# EAGLE board PCF8575C_Panel-v10 (EAGLE 5.00)
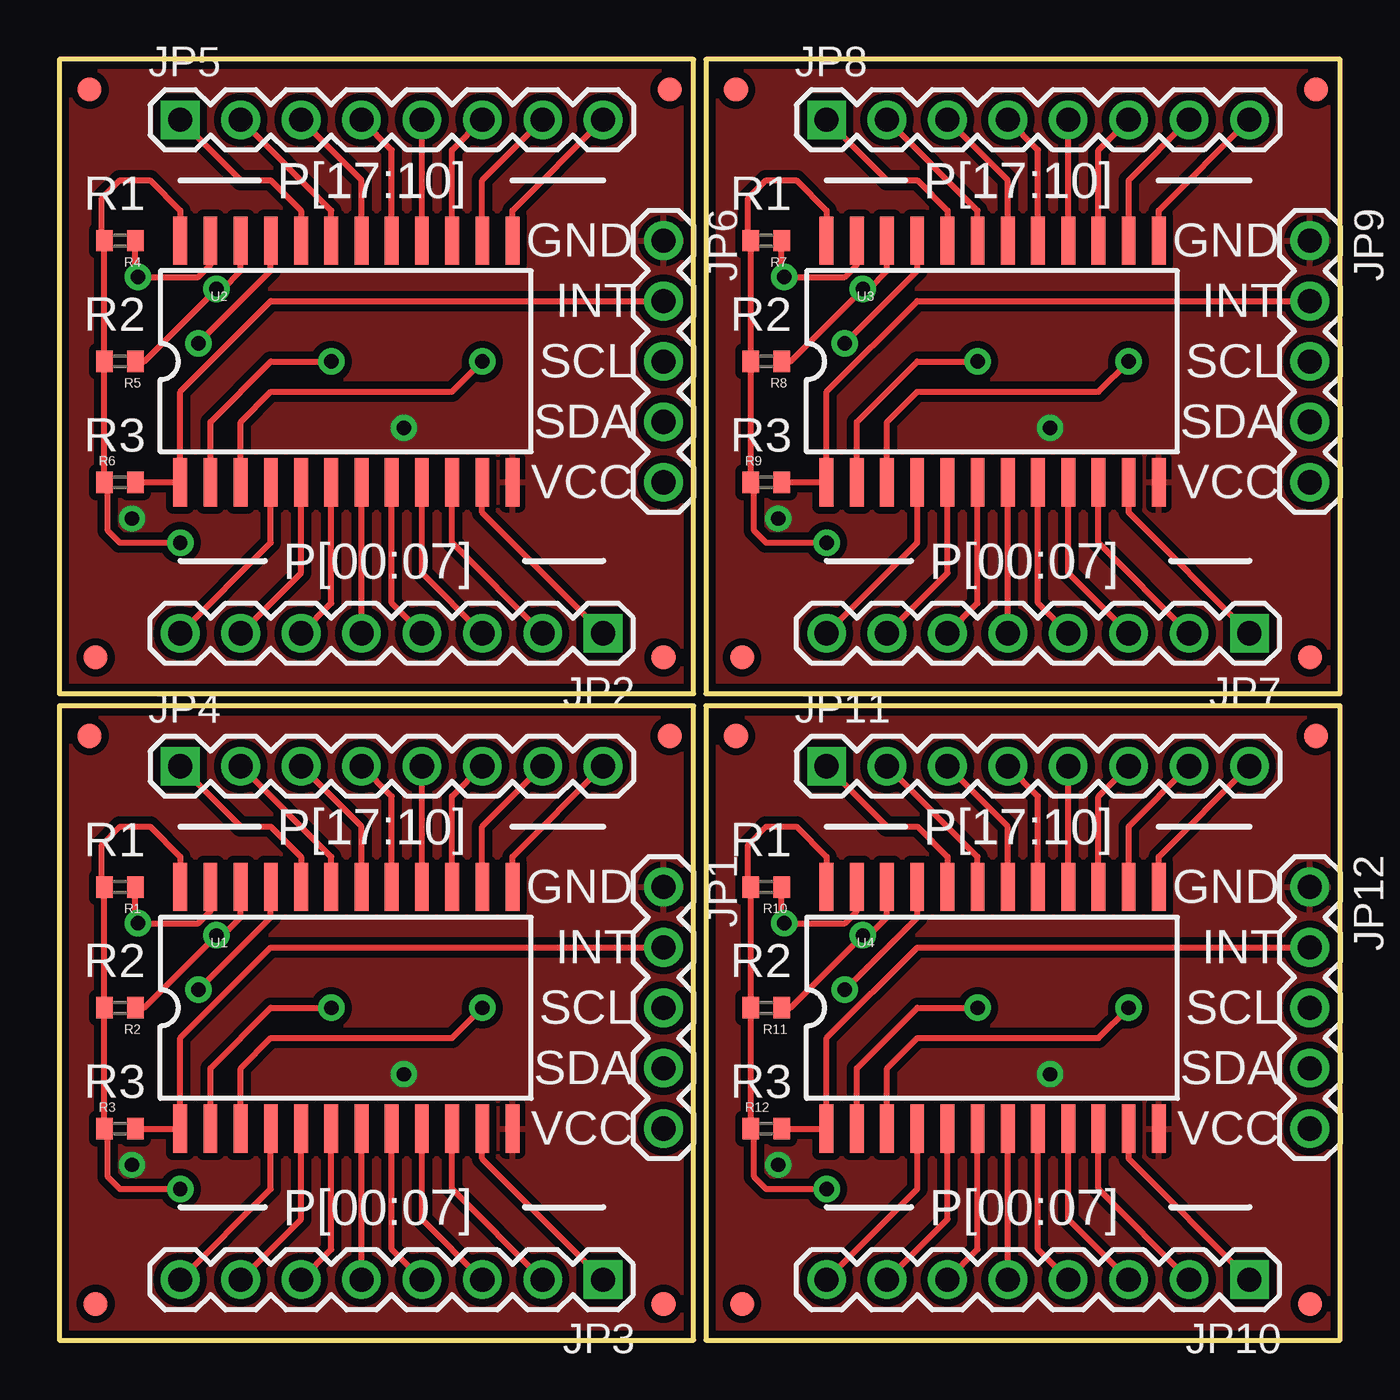
[diagram p0: board, top side]
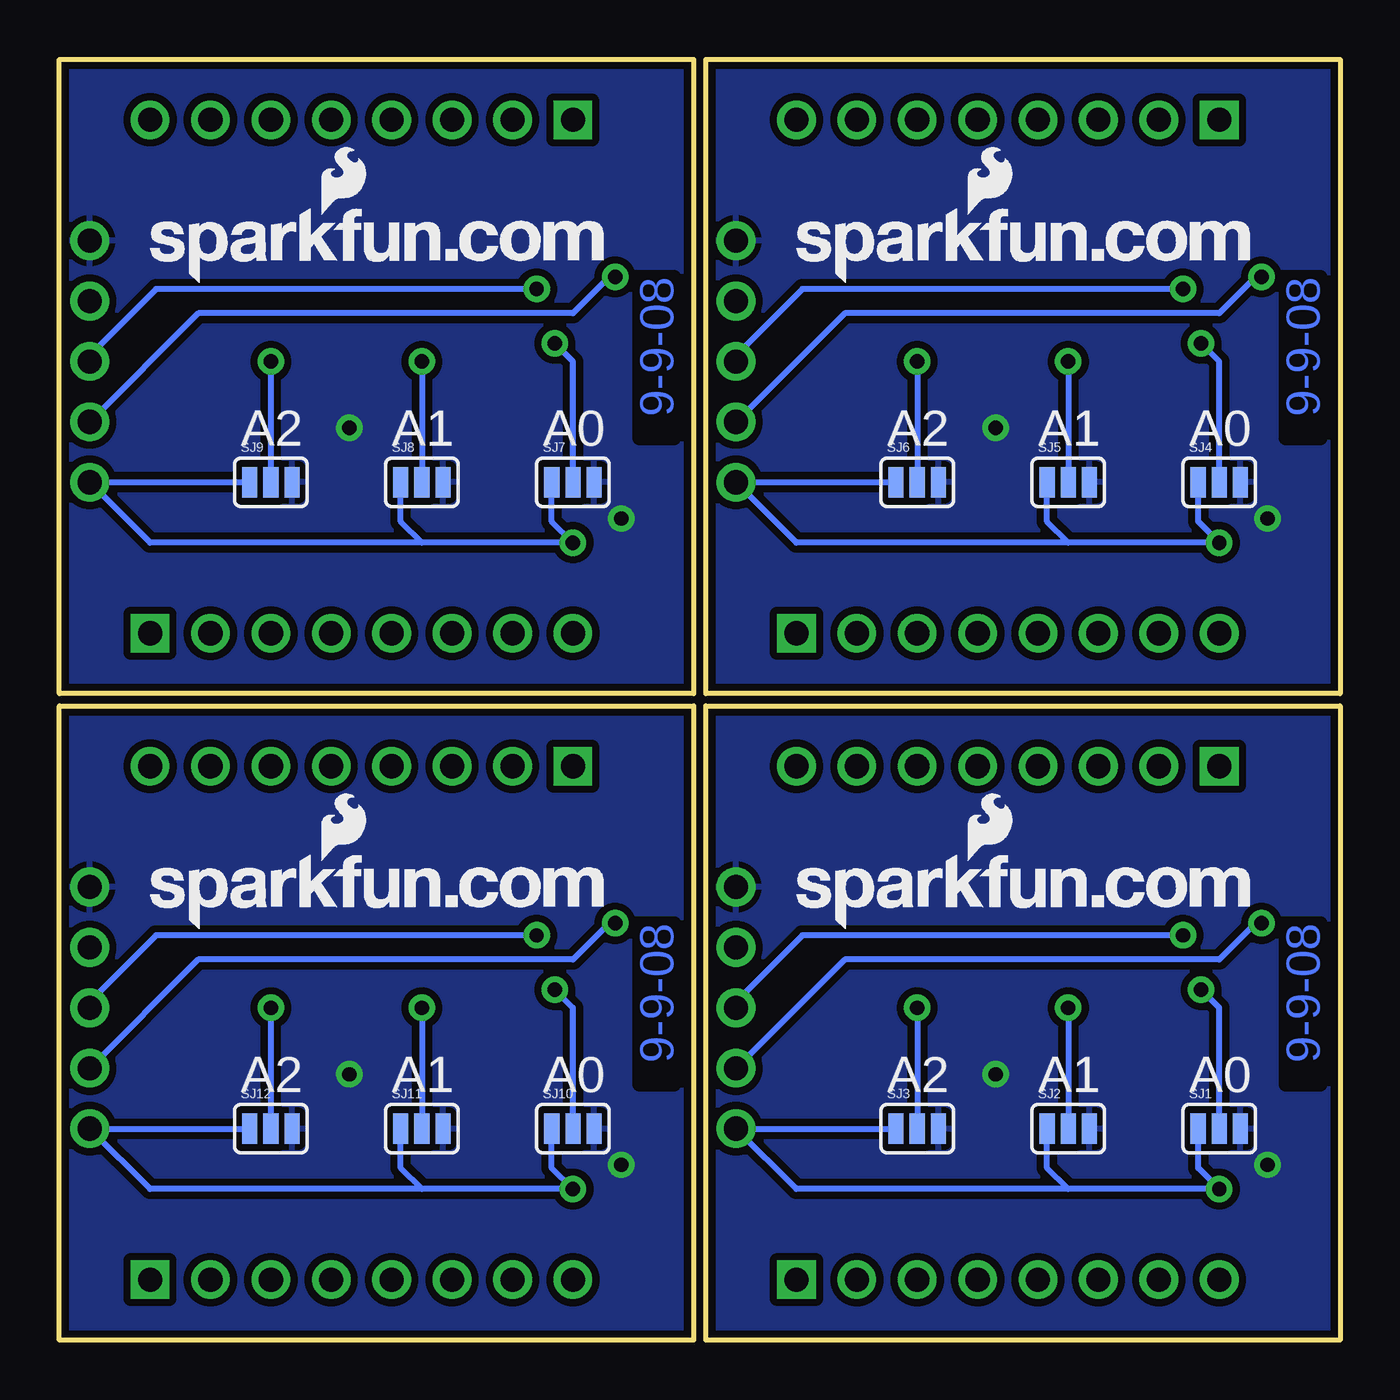
[diagram p1: board, bottom side, seen from below]

Size 53.85 x 53.85 mm. Coordinates in mm from the lower left corner, seen from the top.
Outline: 0,0 26.67,0 26.67,26.67 0,26.67 0,0
Outline: 0,27.18 26.67,27.18 26.67,53.85 0,53.85 0,27.18
Outline: 27.18,27.18 53.85,27.18 53.85,53.85 27.18,53.85 27.18,27.18
Outline: 27.18,0 53.85,0 53.85,26.67 27.18,26.67 27.18,0
Copper layers (1*16): Top 0.0356mm / dielectric 1.5011mm / Bottom 0.0356mm
Design rules "default *": minimum track width 8mil, minimum drill 20mil, track to track 8mil, track to pad 8mil, pad to pad 8mil, via to via 8mil, smd to smd 8mil, copper to edge 10mil, drill to drill 8mil, minimum pad ring 12mil, minimum via ring 10mil, stop-mask expansion 4mil, vias tented up to drill 24mil, thermal gap 10mil

## Footprints (pad centres in the part's own frame; a part is rotated, then mirrored left to right if it is on the bottom)
FIDUCIAL-1X2 = smd 1 x 1: 1 0,0
1X05 = drill 1.016 round: 1 0,0; 2 2.54,0; 3 5.08,0; 4 7.62,0; 5 10.16,0
1X08 = drill 1.016 square: 1 0,0 | drill 1.016 round: 2 2.54,0; 3 5.08,0; 4 7.62,0; 5 10.16,0; 6 12.7,0; 7 15.24,0; 8 17.78,0
C0402 = smd 0.7 x 0.9: 1 -0.65,0; 2 0.65,0
SJ_3 = smd 0.635 x 1.27: 1 -0.889,0; 2 0,0; 3 0.889,0
SO-24DW = smd 0.584 x 2.032: 1 -6.35,-5.08; 2 -5.08,-5.08; 3 -3.81,-5.08; 4 -2.54,-5.08; 5 -1.27,-5.08; 6 0,-5.08; 7 1.27,-5.08; 8 2.54,-5.08; 9 3.81,-5.08; 10 5.08,-5.08; 11 6.35,-5.08; 12 7.62,-5.08; 13 7.62,5.08; 14 6.35,5.08; 15 5.08,5.08; 16 3.81,5.08; 17 2.54,5.08; 18 1.27,5.08; 19 0,5.08; 20 -1.27,5.08; 21 -2.54,5.08; 22 -3.81,5.08; 23 -5.08,5.08; 24 -6.35,5.08

## Placement (x,y rotation side)
E$1  [FIDUCIAL-1X2]  1.27,25.4 0 top
E$2  [FIDUCIAL-1X2]  25.65,25.4 0 top
E$3  [FIDUCIAL-1X2]  1.52,1.52 0 top
E$4  [FIDUCIAL-1X2]  25.4,1.52 0 top
E$5  [FIDUCIAL-1X2]  1.27,52.58 0 top
E$6  [FIDUCIAL-1X2]  25.65,52.58 0 top
E$7  [FIDUCIAL-1X2]  1.52,28.7 0 top
E$8  [FIDUCIAL-1X2]  25.4,28.7 0 top
E$9  [FIDUCIAL-1X2]  28.45,52.58 0 top
E$10  [FIDUCIAL-1X2]  52.83,52.58 0 top
E$11  [FIDUCIAL-1X2]  28.7,28.7 0 top
E$12  [FIDUCIAL-1X2]  52.58,28.7 0 top
E$13  [FIDUCIAL-1X2]  28.45,25.4 0 top
E$14  [FIDUCIAL-1X2]  52.83,25.4 0 top
E$15  [FIDUCIAL-1X2]  28.7,1.52 0 top
E$16  [FIDUCIAL-1X2]  52.58,1.52 0 top
JP1  [1X05]  25.4,19.05 270 top
JP2  [1X08]  22.86,29.72 180 top
JP3  [1X08]  22.86,2.54 180 top
JP4  [1X08]  5.08,24.13 0 top
JP5  [1X08]  5.08,51.31 0 top
JP6  [1X05]  25.4,46.23 270 top
JP7  [1X08]  50.04,29.72 180 top
JP8  [1X08]  32.26,51.31 0 top
JP9  [1X05]  52.58,46.23 270 top
JP10  [1X08]  50.04,2.54 180 top
JP11  [1X08]  32.26,24.13 0 top
JP12  [1X05]  52.58,19.05 270 top
R1  [C0402]  2.54,19.05 180 top
R2  [C0402]  2.54,13.97 180 top
R3  [C0402]  2.54,8.89 0 top
R4  [C0402]  2.54,46.23 180 top
R5  [C0402]  2.54,41.15 180 top
R6  [C0402]  2.54,36.07 0 top
R7  [C0402]  29.72,46.23 180 top
R8  [C0402]  29.72,41.15 180 top
R9  [C0402]  29.72,36.07 0 top
R10  [C0402]  29.72,19.05 180 top
R11  [C0402]  29.72,13.97 180 top
R12  [C0402]  29.72,8.89 0 top
SJ1  A0  [SJ_3]  5.08,8.89 0 bottom
SJ2  A1  [SJ_3]  11.43,8.89 0 bottom
SJ3  A2  [SJ_3]  17.78,8.89 0 bottom
SJ4  A0  [SJ_3]  5.08,36.07 0 bottom
SJ5  A1  [SJ_3]  11.43,36.07 0 bottom
SJ6  A2  [SJ_3]  17.78,36.07 0 bottom
SJ7  A0  [SJ_3]  32.26,36.07 0 bottom
SJ8  A1  [SJ_3]  38.61,36.07 0 bottom
SJ9  A2  [SJ_3]  44.96,36.07 0 bottom
SJ10  A0  [SJ_3]  32.26,8.89 0 bottom
SJ11  A1  [SJ_3]  38.61,8.89 0 bottom
SJ12  A2  [SJ_3]  44.96,8.89 0 bottom
U1  PCF8575C  [SO-24DW]  11.43,13.97 0 top
U2  PCF8575C  [SO-24DW]  11.43,41.15 0 top
U3  PCF8575C  [SO-24DW]  38.61,41.15 0 top
U4  PCF8575C  [SO-24DW]  38.61,13.97 0 top
U$1  LOGO-SFENEW  [SFE-NEW-WEBLOGO]  22.86,44.45 0 bottom
U$2  LOGO-SFENEW  [SFE-NEW-WEBLOGO]  22.86,17.27 0 bottom
U$3  LOGO-SFENEW  [SFE-NEW-WEBLOGO]  50.04,44.45 0 bottom
U$4  LOGO-SFENEW  [SFE-NEW-WEBLOGO]  50.04,17.27 0 bottom

## Library data of the parts
E$1-E$16 JP1-JP12 R1-R12 SJ1-SJ12 U1-U4 U$1-U$4 = SparkFun

## Nets
A0: SJ1.2 U1.21
A1: SJ2.2 U1.2
A2: SJ3.2 U1.3
A3: SJ4.2 U2.21
A4: SJ5.2 U2.2
A5: SJ6.2 U2.3
A6: SJ7.2 U3.21
A7: SJ8.2 U3.2
A8: SJ9.2 U3.3
A9: SJ10.2 U4.21
A10: SJ11.2 U4.2
A11: SJ12.2 U4.3
GND: JP1.1 SJ1.3 SJ2.3 SJ3.3 U1.12
GND1: JP6.1 SJ4.3 SJ5.3 SJ6.3 U2.12
GND2: JP9.1 SJ7.3 SJ8.3 SJ9.3 U3.12
GND3: JP12.1 SJ10.3 SJ11.3 SJ12.3 U4.12
INT: JP1.2 R3.2 U1.1
INT1: JP6.2 R6.2 U2.1
INT2: JP9.2 R9.2 U3.1
INT3: JP12.2 R12.2 U4.1
P1: JP5.1 U2.20
P2: JP5.2 U2.19
P3: JP5.3 U2.18
P4: JP5.4 U2.17
P5: JP5.5 U2.16
P6: JP5.6 U2.15
P7: JP5.7 U2.14
P8: JP5.8 U2.13
P9: JP8.1 U3.20
P10: JP4.8 U1.13
P11: JP4.7 U1.14
P12: JP4.6 U1.15
P13: JP4.5 U1.16
P14: JP4.4 U1.17
P15: JP4.3 U1.18
P16: JP4.2 U1.19
P17: JP4.1 U1.20
P18: JP8.2 U3.19
P19: JP8.3 U3.18
P20: JP8.4 U3.17
P21: JP8.5 U3.16
P22: JP8.6 U3.15
P23: JP8.7 U3.14
P24: JP8.8 U3.13
P25: JP11.1 U4.20
P26: JP11.2 U4.19
P27: JP11.3 U4.18
P28: JP11.4 U4.17
P29: JP11.5 U4.16
P30: JP11.6 U4.15
P31: JP11.7 U4.14
P32: JP11.8 U4.13
PO0: JP3.8 U1.4
PO1: JP3.7 U1.5
PO2: JP3.6 U1.6
PO3: JP3.5 U1.7
PO4: JP3.4 U1.8
PO5: JP3.3 U1.9
PO6: JP3.2 U1.10
PO7: JP3.1 U1.11
PO8: JP2.8 U2.4
PO9: JP2.7 U2.5
PO10: JP2.5 U2.7
PO11: JP2.4 U2.8
PO12: JP2.3 U2.9
PO13: JP2.2 U2.10
PO14: JP2.1 U2.11
PO15: JP2.6 U2.6
PO16: JP7.8 U3.4
PO17: JP7.7 U3.5
PO18: JP7.5 U3.7
PO19: JP7.4 U3.8
PO20: JP7.3 U3.9
PO21: JP7.2 U3.10
PO22: JP7.1 U3.11
PO23: JP7.6 U3.6
PO24: JP10.8 U4.4
PO25: JP10.7 U4.5
PO26: JP10.5 U4.7
PO27: JP10.4 U4.8
PO28: JP10.3 U4.9
PO29: JP10.2 U4.10
PO30: JP10.1 U4.11
PO31: JP10.6 U4.6
SCL: JP1.3 R2.1 U1.22
SCL1: JP6.3 R5.1 U2.22
SCL2: JP9.3 R8.1 U3.22
SCL3: JP12.3 R11.1 U4.22
SDA: JP1.4 R1.1 U1.23
SDA1: JP6.4 R4.1 U2.23
SDA2: JP9.4 R7.1 U3.23
SDA3: JP12.4 R10.1 U4.23
VCC: JP1.5 R1.2 R2.2 R3.1 SJ1.1 SJ2.1 SJ3.1 U1.24
VCC1: JP6.5 R4.2 R5.2 R6.1 SJ4.1 SJ5.1 SJ6.1 U2.24
VCC2: JP9.5 R7.2 R8.2 R9.1 SJ7.1 SJ8.1 SJ9.1 U3.24
VCC3: JP12.5 R10.2 R11.2 R12.1 SJ10.1 SJ11.1 SJ12.1 U4.24

## Tracks (layer width: path | path; a pad name or v marks a point on that pad's centre or on a via)
A0  (via drill 0.6)
  Top 0.254: U1.21 8.89,17.78 v5.84,14.73
  Bottom 0.254: SJ1.2 5.08,13.97 v5.84,14.73
A1  (via drill 0.6)
  Top 0.254: v11.43,13.97 8.89,13.97 6.35,11.43 U1.2
  Bottom 0.254: v11.43,13.97 SJ2.2
A2  (via drill 0.6)
  Top 0.254: v17.78,13.97 16.51,12.7 8.89,12.7 7.62,11.43 U1.3
  Bottom 0.254: v17.78,13.97 SJ3.2
A3  (via drill 0.6)
  Top 0.254: U2.21 8.89,44.96 v5.84,41.91
  Bottom 0.254: SJ4.2 5.08,41.15 v5.84,41.91
A4  (via drill 0.6)
  Top 0.254: v11.43,41.15 8.89,41.15 6.35,38.61 U2.2
  Bottom 0.254: v11.43,41.15 SJ5.2
A5  (via drill 0.6)
  Top 0.254: v17.78,41.15 16.51,39.88 8.89,39.88 7.62,38.61 U2.3
  Bottom 0.254: v17.78,41.15 SJ6.2
A6  (via drill 0.6)
  Top 0.254: U3.21 36.07,44.96 v33.02,41.91
  Bottom 0.254: SJ7.2 32.26,41.15 v33.02,41.91
A7  (via drill 0.6)
  Top 0.254: v38.61,41.15 36.07,41.15 33.53,38.61 U3.2
  Bottom 0.254: v38.61,41.15 SJ8.2
A8  (via drill 0.6)
  Top 0.254: v44.96,41.15 43.69,39.88 36.07,39.88 34.8,38.61 U3.3
  Bottom 0.254: v44.96,41.15 SJ9.2
A9  (via drill 0.6)
  Top 0.254: U4.21 36.07,17.78 v33.02,14.73
  Bottom 0.254: SJ10.2 32.26,13.97 v33.02,14.73
A10  (via drill 0.6)
  Top 0.254: v38.61,13.97 36.07,13.97 33.53,11.43 U4.2
  Bottom 0.254: v38.61,13.97 SJ11.2
A11  (via drill 0.6)
  Top 0.254: v44.96,13.97 43.69,12.7 36.07,12.7 34.8,11.43 U4.3
  Bottom 0.254: v44.96,13.97 SJ12.2
GND  (via drill 0.6)
  other vias: 14.48,11.18 3.05,7.37
  pour Top (isolate 0.305): 0,26.67 0,0 26.67,0 26.67,26.67
  pour Bottom (isolate 0.305): 0,26.67 0,0 26.67,0 26.67,26.67
GND1  (via drill 0.6)
  other vias: 14.48,38.35 3.05,34.54
  pour Top (isolate 0.305): 0,53.85 0,27.18 26.67,27.18 26.67,53.85
  pour Bottom (isolate 0.305): 0,53.85 0,27.18 26.67,27.18 26.67,53.85
GND2  (via drill 0.6)
  other vias: 41.66,38.35 30.23,34.54
  pour Top (isolate 0.305): 27.18,53.85 27.18,27.18 53.85,27.18 53.85,53.85
  pour Bottom (isolate 0.305): 27.18,53.85 27.18,27.18 53.85,27.18 53.85,53.85
GND3  (via drill 0.6)
  other vias: 41.66,11.18 30.23,7.37
  pour Top (isolate 0.305): 27.18,26.67 27.18,0 53.85,0 53.85,26.67
  pour Bottom (isolate 0.305): 27.18,26.67 27.18,0 53.85,0 53.85,26.67
INT
  Top 0.254: R3.2 U1.1 5.08,12.7 8.89,16.51 JP1.2
INT1
  Top 0.254: R6.2 U2.1 5.08,39.88 8.89,43.69 JP6.2
INT2
  Top 0.254: R9.2 U3.1 32.26,39.88 36.07,43.69 JP9.2
INT3
  Top 0.254: R12.2 U4.1 32.26,12.7 36.07,16.51 JP12.2
P1
  Top 0.254: U2.20 10.16,47.5 8.89,48.77 7.62,48.77 JP5.1
P2
  Top 0.254: U2.19 11.43,47.5 JP5.2
P3
  Top 0.254: U2.18 12.7,48.77 JP5.3
P4
  Top 0.254: U2.17 13.97,50.04 JP5.4
P5
  Top 0.254: U2.16 JP5.5
P6
  Top 0.254: U2.15 16.51,50.04 JP5.6
P7
  Top 0.254: U2.14 17.78,48.77 JP5.7
P8
  Top 0.254: U2.13 19.05,47.5 JP5.8
P9
  Top 0.254: U3.20 37.34,47.5 36.07,48.77 34.8,48.77 JP8.1
P10
  Top 0.254: U1.13 19.05,20.32 JP4.8
P11
  Top 0.254: U1.14 17.78,21.59 JP4.7
P12
  Top 0.254: U1.15 16.51,22.86 JP4.6
P13
  Top 0.254: U1.16 JP4.5
P14
  Top 0.254: U1.17 13.97,22.86 JP4.4
P15
  Top 0.254: U1.18 12.7,21.59 JP4.3
P16
  Top 0.254: U1.19 11.43,20.32 JP4.2
P17
  Top 0.254: U1.20 10.16,20.32 8.89,21.59 7.62,21.59 JP4.1
P18
  Top 0.254: U3.19 38.61,47.5 JP8.2
P19
  Top 0.254: U3.18 39.88,48.77 JP8.3
P20
  Top 0.254: U3.17 41.15,50.04 JP8.4
P21
  Top 0.254: U3.16 JP8.5
P22
  Top 0.254: U3.15 43.69,50.04 JP8.6
P23
  Top 0.254: U3.14 44.96,48.77 JP8.7
P24
  Top 0.254: U3.13 46.23,47.5 JP8.8
P25
  Top 0.254: U4.20 37.34,20.32 36.07,21.59 34.8,21.59 JP11.1
P26
  Top 0.254: U4.19 38.61,20.32 JP11.2
P27
  Top 0.254: U4.18 39.88,21.59 JP11.3
P28
  Top 0.254: U4.17 41.15,22.86 JP11.4
P29
  Top 0.254: U4.16 JP11.5
P30
  Top 0.254: U4.15 43.69,22.86 JP11.6
P31
  Top 0.254: U4.14 44.96,21.59 JP11.7
P32
  Top 0.254: U4.13 46.23,20.32 JP11.8
PO0
  Top 0.254: U1.4 8.89,6.35 JP3.8
PO1
  Top 0.254: U1.5 10.16,5.08 JP3.7
PO2
  Top 0.254: U1.6 11.43,3.81 JP3.6
PO3
  Top 0.254: JP3.5 U1.7
PO4
  Top 0.254: U1.8 13.97,3.81 JP3.4
PO5
  Top 0.254: U1.9 15.24,5.08 JP3.3
PO6
  Top 0.254: U1.10 16.51,6.35 JP3.2
PO7
  Top 0.254: U1.11 17.78,7.62 JP3.1
PO8
  Top 0.254: U2.4 8.89,33.53 JP2.8
PO9
  Top 0.254: U2.5 10.16,32.26 JP2.7
PO10
  Top 0.254: JP2.5 U2.7
PO11
  Top 0.254: U2.8 13.97,30.99 JP2.4
PO12
  Top 0.254: U2.9 15.24,32.26 JP2.3
PO13
  Top 0.254: U2.10 16.51,33.53 JP2.2
PO14
  Top 0.254: U2.11 17.78,34.8 JP2.1
PO15
  Top 0.254: U2.6 11.43,30.99 JP2.6
PO16
  Top 0.254: U3.4 36.07,33.53 JP7.8
PO17
  Top 0.254: U3.5 37.34,32.26 JP7.7
PO18
  Top 0.254: JP7.5 U3.7
PO19
  Top 0.254: U3.8 41.15,30.99 JP7.4
PO20
  Top 0.254: U3.9 42.42,32.26 JP7.3
PO21
  Top 0.254: U3.10 43.69,33.53 JP7.2
PO22
  Top 0.254: U3.11 44.96,34.8 JP7.1
PO23
  Top 0.254: U3.6 38.61,30.99 JP7.6
PO24
  Top 0.254: U4.4 36.07,6.35 JP10.8
PO25
  Top 0.254: U4.5 37.34,5.08 JP10.7
PO26
  Top 0.254: JP10.5 U4.7
PO27
  Top 0.254: U4.8 41.15,3.81 JP10.4
PO28
  Top 0.254: U4.9 42.42,5.08 JP10.3
PO29
  Top 0.254: U4.10 43.69,6.35 JP10.2
PO30
  Top 0.254: U4.11 44.96,7.62 JP10.1
PO31
  Top 0.254: U4.6 38.61,3.81 JP10.6
SCL  (via drill 0.6)
  Top 0.254: R2.1 3.56,13.97 v6.6,17.02 6.86,17.02 7.62,17.78 U1.22
  Bottom 0.254: JP1.3 25.4,14.22 22.61,17.02 v6.6,17.02
SCL1  (via drill 0.6)
  Top 0.254: R5.1 3.56,41.15 v6.6,44.2 6.86,44.2 7.62,44.96 U2.22
  Bottom 0.254: JP6.3 25.4,41.4 22.61,44.2 v6.6,44.2
SCL2  (via drill 0.6)
  Top 0.254: R8.1 30.73,41.15 v33.78,44.2 34.04,44.2 34.8,44.96 U3.22
  Bottom 0.254: JP9.3 52.58,41.4 49.78,44.2 v33.78,44.2
SCL3  (via drill 0.6)
  Top 0.254: R11.1 30.73,13.97 v33.78,17.02 34.04,17.02 34.8,17.78 U4.22
  Bottom 0.254: JP12.3 52.58,14.22 49.78,17.02 v33.78,17.02
SDA  (via drill 0.6)
  Top 0.254: R1.1 3.19,17.64 v3.3,17.53 5.84,17.53 6.35,18.03 U1.23
  Bottom 0.254: JP1.4 20.83,16 5.08,16 3.56,17.53 v3.3,17.53
SDA1  (via drill 0.6)
  Top 0.254: R4.1 3.19,44.82 v3.3,44.7 5.84,44.7 6.35,45.21 U2.23
  Bottom 0.254: JP6.4 20.83,43.18 5.08,43.18 3.56,44.7 v3.3,44.7
SDA2  (via drill 0.6)
  Top 0.254: R7.1 30.37,44.82 v30.48,44.7 33.02,44.7 33.53,45.21 U3.23
  Bottom 0.254: JP9.4 48.01,43.18 32.26,43.18 30.73,44.7 v30.48,44.7
SDA3  (via drill 0.6)
  Top 0.254: R10.1 30.37,17.64 v30.48,17.53 33.02,17.53 33.53,18.03 U4.23
  Bottom 0.254: JP12.4 48.01,16 32.26,16 30.73,17.53 v30.48,17.53
VCC  (via drill 0.6)
  Top 0.254: 2.03,8.89 R3.1 | 2.03,8.89 1.89,9.03 R2.2 1.78,13.97 1.89,14.08 R1.2 1.78,19.05 1.78,20.83 2.54,21.59 3.81,21.59 5.08,20.32 U1.24 | 2.03,8.89 2.03,6.86 2.54,6.35 v5.08,6.35
  Bottom 0.254: SJ3.1 JP1.5 22.86,6.35 11.43,6.35 | SJ1.1 5.97,7.24 v5.08,6.35 11.43,6.35 | SJ2.1 12.32,7.24 11.43,6.35
VCC1  (via drill 0.6)
  Top 0.254: 2.03,36.07 R6.1 | 2.03,36.07 1.89,36.21 R5.2 1.78,41.15 1.89,41.26 R4.2 1.78,46.23 1.78,48.01 2.54,48.77 3.81,48.77 5.08,47.5 U2.24 | 2.03,36.07 2.03,34.04 2.54,33.53 v5.08,33.53
  Bottom 0.254: SJ6.1 JP6.5 22.86,33.53 11.43,33.53 | SJ4.1 5.97,34.42 v5.08,33.53 11.43,33.53 | SJ5.1 12.32,34.42 11.43,33.53
VCC2  (via drill 0.6)
  Top 0.254: 29.21,36.07 R9.1 | 29.21,36.07 29.07,36.21 R8.2 28.96,41.15 29.07,41.26 R7.2 28.96,46.23 28.96,48.01 29.72,48.77 30.99,48.77 32.26,47.5 U3.24 | 29.21,36.07 29.21,34.04 29.72,33.53 v32.26,33.53
  Bottom 0.254: SJ9.1 JP9.5 50.04,33.53 38.61,33.53 | SJ7.1 33.15,34.42 v32.26,33.53 38.61,33.53 | SJ8.1 39.5,34.42 38.61,33.53
VCC3  (via drill 0.6)
  Top 0.254: 29.21,8.89 R12.1 | 29.21,8.89 29.07,9.03 R11.2 28.96,13.97 29.07,14.08 R10.2 28.96,19.05 28.96,20.83 29.72,21.59 30.99,21.59 32.26,20.32 U4.24 | 29.21,8.89 29.21,6.86 29.72,6.35 v32.26,6.35
  Bottom 0.254: SJ12.1 JP12.5 50.04,6.35 38.61,6.35 | SJ10.1 33.15,7.24 v32.26,6.35 38.61,6.35 | SJ11.1 39.5,7.24 38.61,6.35

## Text on the board
Bottom: 9-9-08 | 9-9-08 | 9-9-08 | 9-9-08
tPlace: P[17:10] | P[17:10] | R1 | GND | R1 | GND | INT | INT | R2 | SCL | R2 | SCL | SDA | SDA | R3 | VCC | R3 | VCC | P[00:07] | P[00:07] | P[17:10] | P[17:10] | R1 | GND | R1 | GND | INT | INT | R2 | SCL | R2 | SCL | SDA | SDA | R3 | VCC | R3 | VCC | P[00:07] | P[00:07]
bPlace: A0 | A1 | A2 | A0 | A1 | A2 | A0 | A1 | A2 | A0 | A1 | A2